# Altium PCB PCB1.pcbdoc
Units mil, origin at the board's own origin, x right, y up, seen from the top; angles counter-clockwise.
Board outline 4550 x 4400 mil, 2 copper layers (Top Layer, Bottom Layer); 39 components, 48 nets, 154 pads, 0 vias.
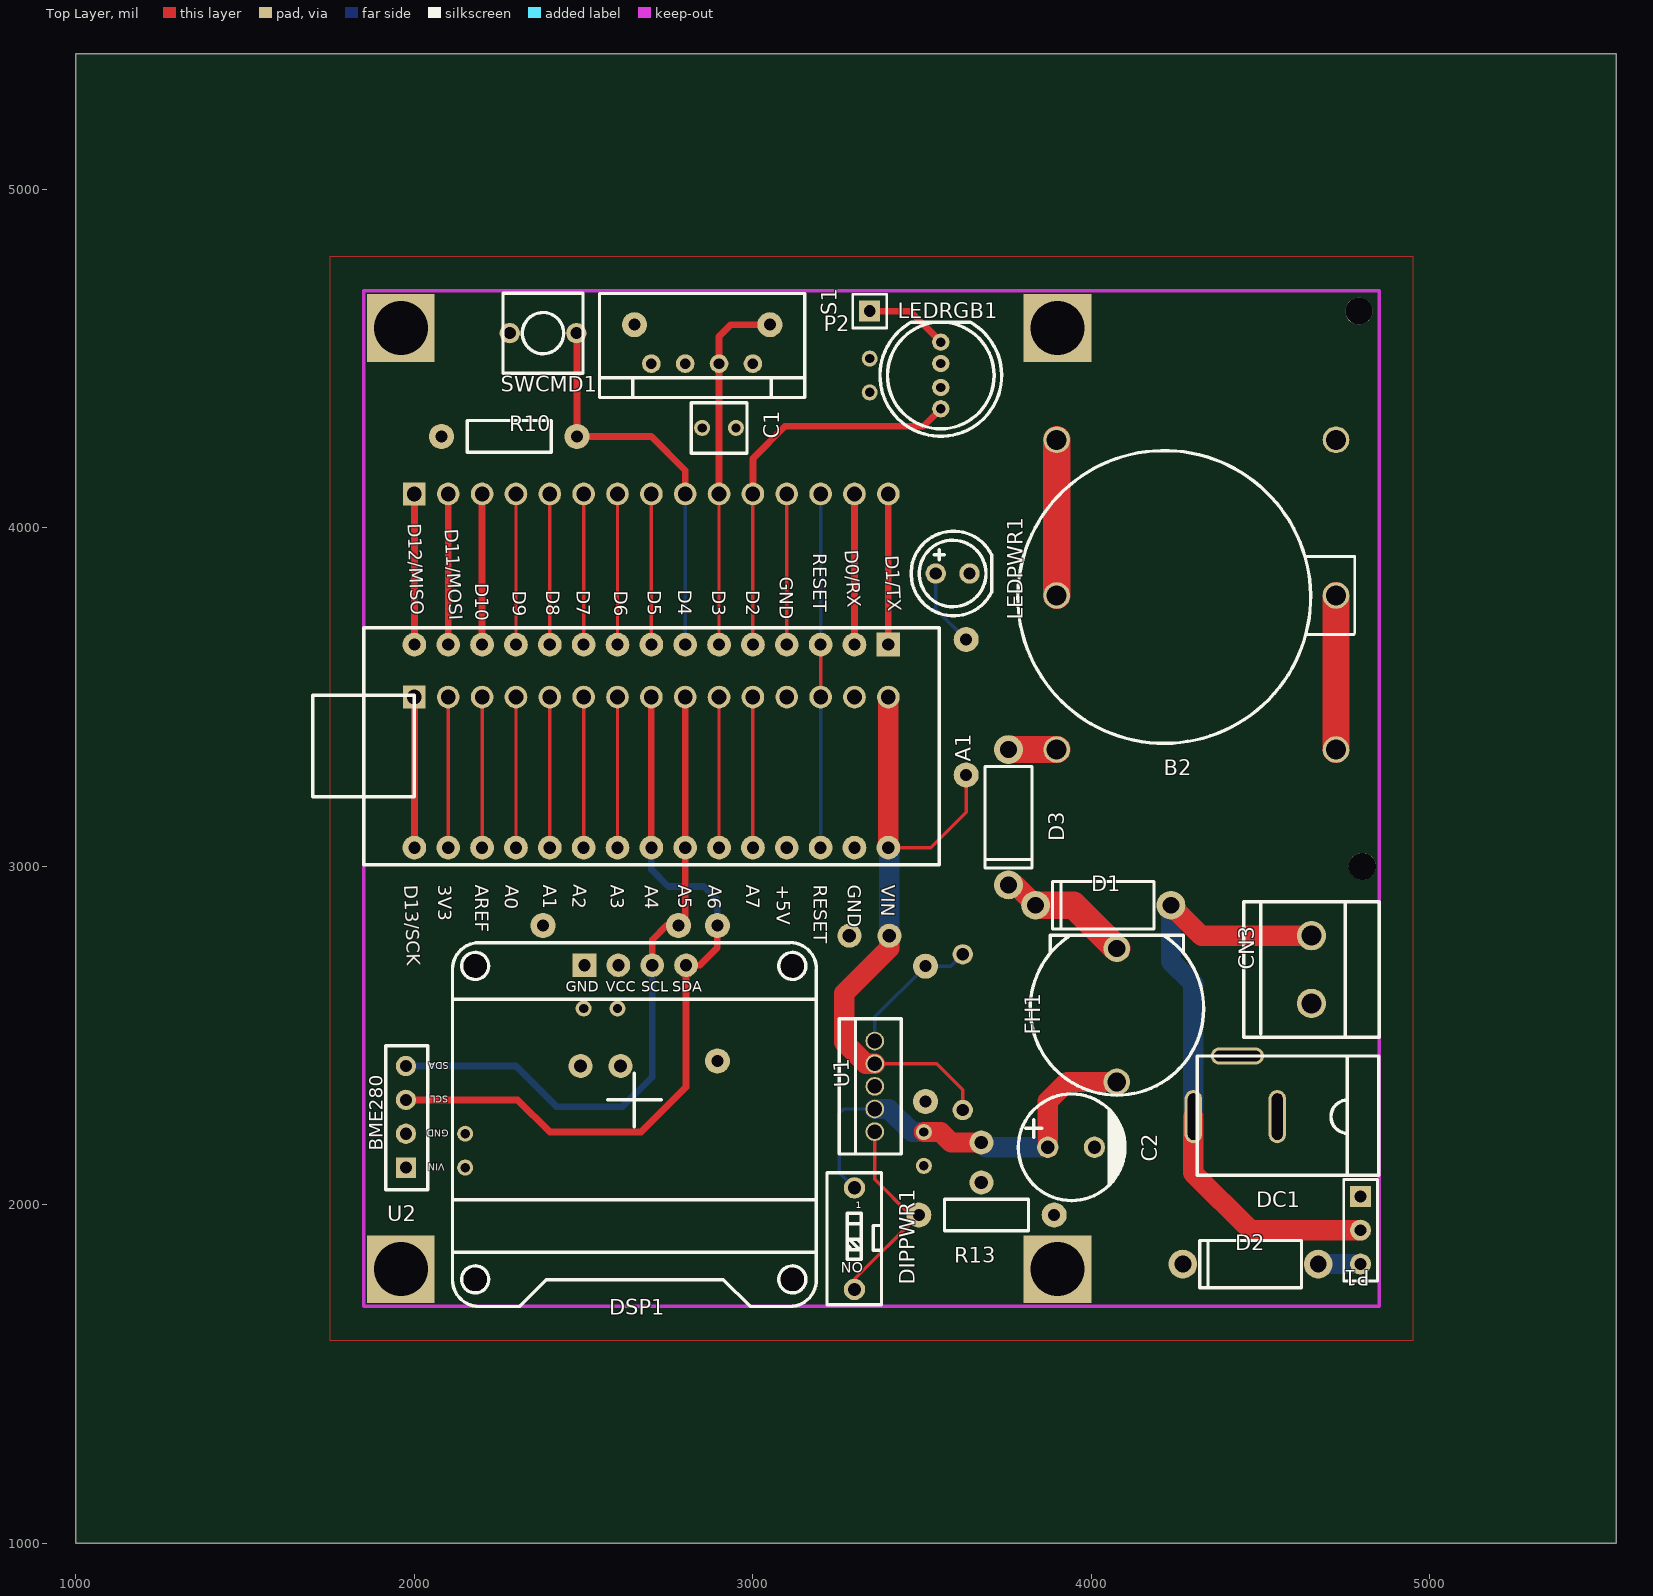
[diagram p0: Top Layer view]
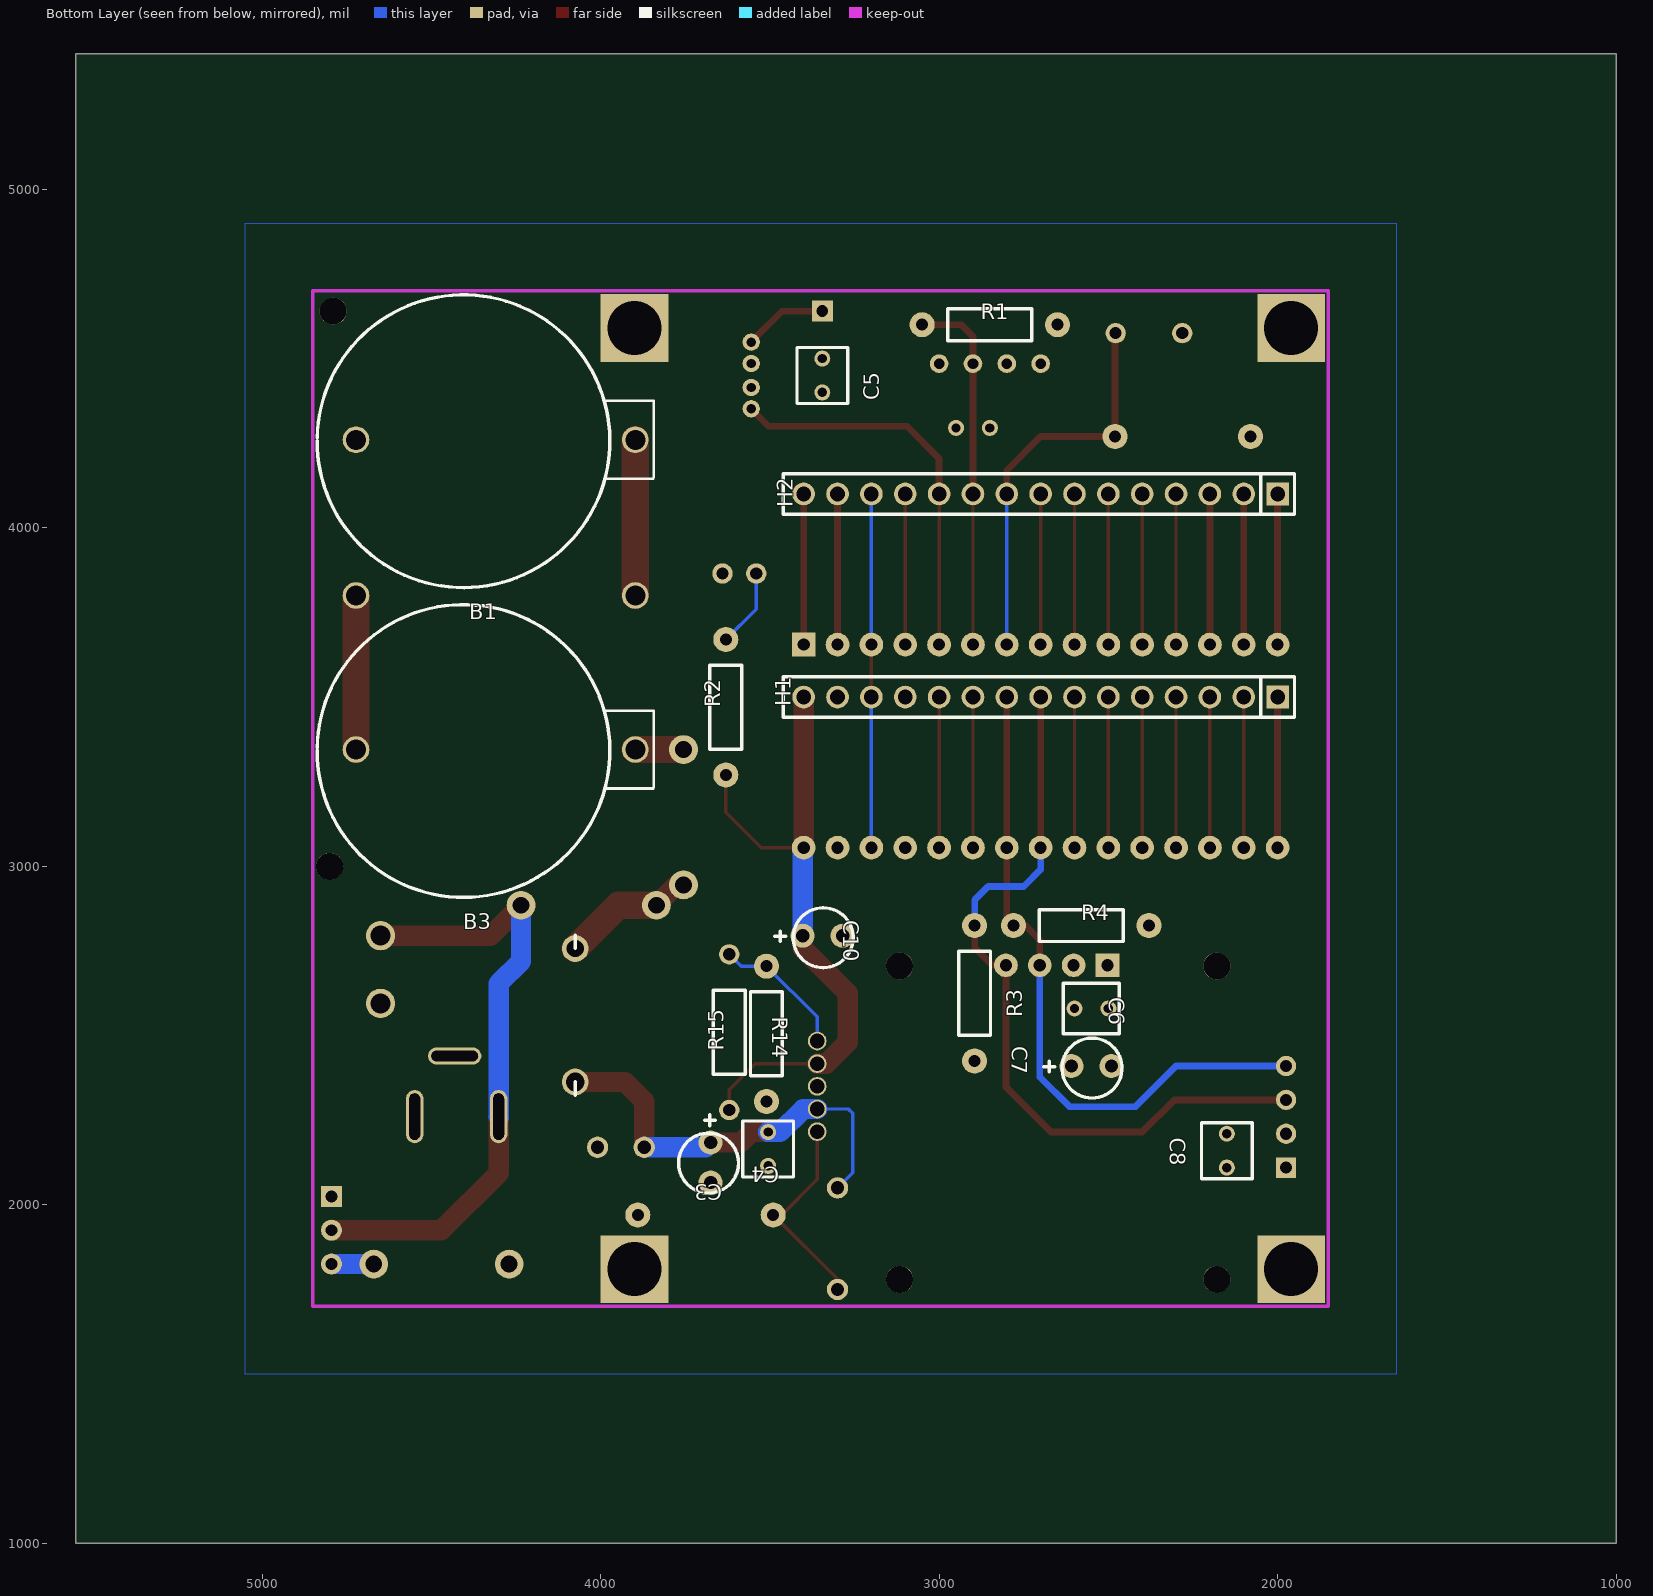
[diagram p1: Bottom Layer view, seen from below]

## Layer stack, top to bottom
Top Layer: signal copper (thickness not stored)
Dielectric: dielectric 12.6, FR-4, Dk 4.8
Bottom Layer: signal copper (thickness not stored)

## Board outline
5550,1000 1000,1000 1000,5400 5550,5400

## Components (designator, comment, footprint, x,y, rotation, side; value= is the part's Value field where it differs from the comment)
A1 "Arduino_Nano_V3" ARDUINO_NANO_V3 2700,3355 r270 top
B1 "BS-2-1" BATTERY-1#1 4310,4260 r180 bottom
B2 "BS-2-1" BATTERY-1#2 4310,3800 r180 top
B3 "BS-2-1" BATTERY-1#1 4310,3345 r180 bottom
C1 "100nF" CAP-CT4-0805-4.2X3.8#1 2900,4295 r180 top
C2 "100uF" CAP-D8.0XF3.5 3940,2170 r90 top
C3 "10uF" CAP-TAN-S2.5 3675,2125 r0 bottom
C4 "1uF" CAP-CT4-0805-4.2X3.8#2 3505,2165 r90 bottom
C5 "100nF" CAP-CT4-0805-4.2X3.8#2 3345,4450 r90 bottom
C6 "100nF" CAP-CT4-0805-4.2X3.8#2 2550,2580 r0 bottom
C7 "1uF" CAP-TAN-S2.5 2550,2410 r270 bottom
C8 "100nF" CAP-CT4-0805-4.2X3.8#2 2150,2160 r90 bottom
C10 "10uF" CAP-TAN-S2.5 3344.06,2795 r270 bottom
CN3 "MKDSN1.5/2-5.08" MKDSN1.5/2-5.08 4650,2695 r90 top
D1 "1N5817RLG" DO-15 4035,2885 r180 top
D2 "1N5817RLG" DO-15 4470,1825 r180 top
D3 "1N5817RLG" DO-15 3755,3145 r270 top
DC1 "DC005-2.0MM" DC-5020 4425,2350 r180 top
DIPPWR1 "VDG/S-01L blue" VDG/S-01L 3300,1900 r180 top
DSP1 "SSD1306 DSP ARDUINO" SSD1306_ARDUINO 2650,2310 r0 top
FH1 "Fuse-holder - C268208" "FUSE-HOLDER- C268208" 4075,2560 r270 top
H1 "Header-Female-2.54_1x15" DIP-1X15P2.54 2700,3500 r180 bottom
H2 "Header-Female-2.54_1x15" DIP-1X15P2.54 2700,4100 r180 bottom
LEDPWR1 "333-2SUGC/S400-A5-L" LED-TH_BD6.2-P2.54-FD 3590,3865 r0 top
LEDRGB1 "WS2812D-F8" LED-8.0-RGB4P 3555,4450 r270 top
P1 "PWR-VCD" HDR-3X1/2.54 4795,1925 r270 top
P2 "Header-Male-2.54_1x1" HDR-1X1/2.54 3345,4640 r0 top
R1 "1K" AXIAL-0.4#1 2850,4600 r0 bottom
R2 "330" AXIAL-0.4#1 3630,3470 r270 bottom
R3 "1K" AXIAL-0.4#1 2895,2625 r90 bottom
R4 "1K" AXIAL-0.4#1 2580,2825 r0 bottom
R10 "1K" AXIAL-0.4#2 2280,4270 r0 top
R13 "10K" AXIAL-0.4#2 3690,1970 r180 top
R14 "1.5K" AXIAL-0.4#1 3510,2505 r270 bottom
R15 "7.5K" AXIAL-6.3X2.4 3620,2510 r90 bottom
S1 "AM2302" AM2302 2850,4485 r180 top
SWCMD1 "KAN0654-0701A" KAN0654-0601B 2380,4575 r0 top
U1 "MIC29502WT-5.0" TO-220-5-(10.67X4.83) 3360,2350 r90 top
U2 "BME280 DOC" "BME280 DOC" 1975,2110 r180 top

## Footprints (in the part's own frame and the unit in brackets; to place one, negate y for a bottom-side part, rotate by r counter-clockwise, add the part's x,y. Pads: shape width x height; smd on the part's side, far side on the other; paste and mask are expansions set on the pad)
AM2302 [mm]
  round 1.4 hole 0.8: 1(-3.81,0) 2(-1.27,0) 3(1.27,0) 4(3.81,0)
  silkscreen extent -7.71,-5.26 7.7,2.54
ARDUINO_NANO_V3 [mil]
  rect 70x70 hole 36: 1(-300,700)
  round 70 hole 36: 2(-300,600) 3(-300,500) 4(-300,400) 5(-300,300) 6(-300,200) 7(-300,100) 8(-300,0) 9(-300,-100) 10(-300,-200) 11(-300,-300) 12(-300,-400) 13(-300,-500) 14(-300,-600) 15(-300,-700) 16(300,-700) 17(300,-600) 18(300,-500) 19(300,-400) 20(300,-300) 21(300,-200) 22(300,-100) 23(300,0) 24(300,100) 25(300,200) 26(300,300) 27(300,400) 28(300,500) 29(300,600) 30(300,700)
  silkscreen extent -350,-1000 350,850
AXIAL-0.4#1 [mil]
  round 74 hole 35.4: 1(200,0) 2(-200,0)
  silkscreen extent -124,-47 124,47
AXIAL-0.4#2 [mil]
  round 74 hole 35.4: 1(-200,0) 2(200,0)
  silkscreen extent -124,-47 124,47
AXIAL-6.3X2.4 [mil]
  round 60 hole 36: 1(230,0) 2(-230,0)
  silkscreen extent -124,-47 124,47
BATTERY-1#1 [mm]
  round 2 hole 1.5: 1(10.477,0) 2(-10.477,0)
  silkscreen extent -13.4,-11.09 11.87,10.87
BATTERY-1#2 [mm]
  round 2 hole 1.5: 1(-10.477,0) 2(10.477,0)
  silkscreen extent -11.87,-10.87 13.4,11.09
"BME280 DOC" [mil]
  rect 60x60 hole 36: 1(0,0)
  round 60 hole 36: 2(0,-100) 3(0,-200) 4(0,-300)
  silkscreen extent -65,-360 60,65
CAP-CT4-0805-4.2X3.8#1 [mm]
  round 1.2 hole 0.7: 1(-1.27,0) 2(1.27,0)
  silkscreen extent -2.1,-1.9 2.1,1.9
CAP-CT4-0805-4.2X3.8#2 [mm]
  round 1.2 hole 0.7: 1(1.27,0) 2(-1.27,0)
  silkscreen extent -2.1,-1.9 2.1,1.9
CAP-D8.0XF3.5 [mm]
  round 1.6 hole 1: 1(0,1.75) 2(0,-1.75)
  silkscreen extent -4,-4.04 4,3.96
CAP-TAN-S2.5 [mm]
  round 1.8 hole 1: 1(0,-1.5) 2(0,1.5)
  silkscreen extent -2.1,-3.6 2.4,2.29
DC-5020 [mm]
  oval 1.3x4 hole 0.8 slot 3.5 at 90 deg: 1(3.15,2.275) 2(-3.15,2.275)
  oval 4x1.3 hole 0.8 slot 3.5 at 0 deg: 3(-0.15,-2.275)
  silkscreen extent -10.75,-2.28 2.85,6.67
DIP-1X15P2.54 [mm]
  rect 1.7x1.7 hole 1.1: 1(17.78,0)
  round 1.7 hole 1.1: 2(15.24,0) 3(12.7,0) 4(10.16,0) 5(7.62,0) 6(5.08,0) 7(2.54,0) 8(0,0) 9(-2.54,0) 10(-5.08,0) 11(-7.62,0) 12(-10.16,0) 13(-12.7,0) 14(-15.24,0) 15(-17.78,0)
  silkscreen extent -19.3,-1.52 19.05,1.52
DO-15 [mil]
  round 85 hole 50: 1(-200,0) 2(200,0)
  silkscreen extent -150,-70 150,70
"FUSE-HOLDER- C268208" [mm]
  round 2 hole 1.3: 1(-5.005,0)
  round 2 hole 1.4: 2(5.005,0)
  silkscreen extent -6.01,-6.49 6,6.51
HDR-1X1/2.54 [mil]
  rect 62x62 hole 35: 1(0,0)
  silkscreen extent -50,-50 50,50
HDR-3X1/2.54 [mil]
  rect 62x62 hole 35: 1(-100,0)
  round 62 hole 35: 2(0,0) 3(100,0)
  silkscreen extent -150,-50 150,50
KAN0654-0601B [mil]
  round 60 hole 36: 1(-98.42,0) 2(98.43,0)
  silkscreen extent -118,-118 118,118
LED-8.0-RGB4P [mm]
  round 1.3 hole 0.7: 1(-2.499,0) 2(-0.899,0) 3(0.899,0) 4(2.499,0)
  silkscreen extent -4,-4.56 4.56,4.56
LED-TH_BD6.2-P2.54-FD [mil]
  round 60 hole 36: 1(-50,0) 2(50,0)
  silkscreen extent -122,-125 115,125
MKDSN1.5/2-5.08 [mm]
  round 2.2 hole 1.5: 1(-2.54,0) 2(2.54,0)
  silkscreen extent -5.08,-5.08 5.08,5.08
SSD1306_ARDUINO [mil]
  rect 70x70 hole 36: 1(-147.4,397.6)
  round 70 hole 36: 2(-47.4,397.63) 3(52.6,397.63) 4(152.6,397.63)
  round 80 hole 80 unplated: ""(-470.51,-530.27) ""(-470.51,395.63) ""(466.5,-530.27) ""(466.5,395.63)
  silkscreen extent -538,-610 538,465
TO-220-5-(10.67X4.83) [mm]
  round 1.4 hole 1.1: 1(-3.4,0) 2(-1.7,0) 3(0,0) 4(1.7,0) 5(3.4,0)
  silkscreen extent -5.08,-2 5.08,2.67
VDG/S-01L [mm]
  round 1.6 hole 1: 1(0,-3.81) 2(0,3.81)
  silkscreen extent -2.03,-4.95 2.06,4.95

## Free pads (board coordinates)
  rect 200x200 hole 160: 1(1960,1810) 1(1960,4590) 1(3900,1810) 1(3900,4590)
  round 80 hole 80 unplated: ""(4790,4640) ""(4800,3000)

## Nets (pads, with @x,y where several pads share a name; then routed paths per layer and width w, separated by ;. In a path a pad name is that pad's centre, name@x,y a point inside that pad or via, vN(x,y) a via of type N, cw(c..) or ccw(c..) an arc to the next point about the centre after c; other vN are vias at no path point)
+3V3: A1.17 H1.2 | length 445
  Top Layer w10: A1.17 H1.2
+5V: A1.27 C1.1 C5.1 C6.1 C7.1 C8.1 D2.2 DSP1.2 H1.12 LEDRGB1.2 R1.2 R3.2 R4.2 S1.1 SWCMD1.1 U2.1
+7V5: A1.30 C10.1 H1.15 R2.1 R15.2 U1.4 | length 1927.9
  Top Layer w10: U1.4 3543.1,2416.9 3620,2340 R15.2 ; A1.30 3525,3055 3630,3160 R2.1
  Top Layer w60: U1.4 3333.1,2416.9 3270,2480 3270,2625 3403.1,2758.1 C10.1 ; A1.30 H1.15
  Bottom Layer w60: A1.30 3403.12,3051.88 C10.1
A0: A1.19 H1.4 | length 445
  Top Layer w10: A1.19 H1.4
A1: A1.20 H1.5 | length 445
  Top Layer w10: A1.20 H1.5
A2: A1.21 H1.6 | length 445
  Top Layer w10: A1.21 H1.6
A3: A1.22 H1.7 | length 445
  Top Layer w10: A1.22 H1.7
A6: A1.25 H1.10 | length 445
  Top Layer w10: A1.25 H1.10
A7: A1.26 H1.11 | length 445
  Top Layer w10: A1.26 H1.11
B2_2: B1.1 B2.2 | length 460
  Top Layer w80: B2.2 B1.1
B3_2: B2.1 B3.2 | length 455
  Top Layer w80: B3.2 B2.1
D0/TX: A1.1 H2.15 | length 445
  Top Layer w20: A1.1 H2.15
D1/RX: A1.2 H2.14 | length 445
  Top Layer w20: A1.2 H2.14
D2: A1.5 H2.11 LEDRGB1.4 | length 1165.7
  Top Layer w10: A1.5 H2.11
  Top Layer w20: H2.11 3000,4205 3095,4300 3503.4,4300 LEDRGB1.4
D3/PWM: A1.6 H2.10 R1.1 S1.2 | length 1074.5
  Top Layer w10: A1.6 H2.10
  Top Layer w20: H2.10 S1.2 2900,4565 2935,4600 R1.1
D3_1: B3.1 D3.1 | length 142.5
  Top Layer w80: D3.1 B3.1
D4: A1.7 H2.9 R10.2 SWCMD1.2 | length 1182.1
  Top Layer w20: SWCMD1.2 2480,4573.43 R10.2 2700,4270 2800,4170 H2.9
  Bottom Layer w10: A1.7 H2.9
D5/PWM: A1.8 H2.8 | length 445
  Top Layer w10: A1.8 H2.8
D6/PWM: A1.9 H2.7 | length 445
  Top Layer w10: A1.9 H2.7
D7: A1.10 H2.6 | length 445
  Top Layer w10: A1.10 H2.6
D8: A1.11 H2.5 | length 445
  Top Layer w10: A1.11 H2.5
D9/PWM: A1.12 H2.4 | length 445
  Top Layer w10: A1.12 H2.4
D10/PWM/SS: A1.13 H2.3 | length 445
  Top Layer w20: A1.13 H2.3
D11/PWM/MOSI: A1.14 H2.2 | length 445
  Top Layer w20: A1.14 H2.2
D12/MISO: A1.15 H2.1 | length 445
  Top Layer w20: A1.15 H2.1
D13/SCK: A1.16 H1.1 | length 445
  Top Layer w20: A1.16 H1.1
DIPPWR1_2: DIPPWR1.2 R13.2 U1.1 | length 613.3
  Top Layer w10: DIPPWR1.2 3300,1780 R13.2 3465,1970 3360,2075 U1.1
FH1_1: D1.2 D3.2 FH1.1 | length 397.9
  Top Layer w60: D3.2 3775,2945 D1.2
  Top Layer w80: D1.2 3947.05,2885 FH1.1
GND: A1.4 A1.29 B1.2 C1.2 C2.2 C3.2 C4.2 C5.2 C6.2 C7.2 C8.2 C10.2 CN3.1 DC1.2 DC1.3 DSP1.1 H1.14 H2.12 LEDPWR1.2 LEDRGB1.3 P1.1 pad.1 R10.1 R13.1 R14.1 S1.3 S1.4 U1.3 U2.2 | length 445
  Top Layer w10: A1.4 H2.12
P1_3: D2.1 P1.3 | length 125
  Bottom Layer w60: D2.1 P1.3
P2_1: LEDRGB1.1 P2.1 | length 247.9
  Top Layer w20: P2.1 3463.4,4640 LEDRGB1.1
R2_2: LEDPWR1.1 R2.2 | length 232.3
  Bottom Layer w10: LEDPWR1.1 3540,3760 R2.2
R15_1: R14.2 R15.1 U1.5 | length 407.8
  Bottom Layer w10: U1.5 3360,2555 R14.2 3585,2705 R15.1
RST: A1.3 A1.28 H1.13 H2.13 | length 1045
  Top Layer w10: H1.13 A1.3
  Bottom Layer w10: A1.28 H1.13 ; A1.3 H2.13
S$6: 
S$8: 
S$12: 
S$14: 
S$15: 
S$27: 
S$39: 
S$46: 
S$54: 
SCL: A1.24 DSP1.3 H1.9 R4.1 U2.4 | length 1996.8
  Top Layer w20: DSP1.3 2702.6,2782.6 2745,2825 R4.1 2800,2845 A1.24 H1.9
  Bottom Layer w20: U2.4 2300,2410 2420,2290 2615,2290 2702.6,2377.6 DSP1.3
SDA: A1.23 DSP1.4 H1.8 R3.1 U2.3 | length 2278.2
  Top Layer w20: U2.3 2305,2310 2400,2215 2670,2215 2802.6,2347.6 DSP1.4 ; A1.23 H1.8 ; DSP1.4 2842.63,2707.63 2895,2760 R3.1
  Bottom Layer w20: A1.23 2700,2990 2750,2940 2855,2940 2895,2900 R3.1
VCC: C2.1 C3.1 C4.1 DIPPWR1.1 FH1.2 U1.2 | length 1270.5
  Top Layer w60: C4.1 3555,2215 3585.94,2184.06 C3.1 ; C2.1 3871.1,2306.1 3927.96,2362.96 FH1.2
  Bottom Layer w10: DIPPWR1.1 3255,2095 3255,2270 3268.07,2283.07 U1.2
  Bottom Layer w60: U1.2 3401.93,2283.07 3470,2215 C4.1 ; C3.1 3689.06,2170 C2.1
VIN: CN3.2 D1.1 DC1.1 P1.2 | length 1835.4
  Top Layer w60: D1.1 4325,2795 CN3.2 ; DC1.1 4300.99,2095.99 4300,2095 4470,1925 P1.2
  Bottom Layer w60: D1.1 4235,2720 4300.99,2654.01 DC1.1
VREF: A1.18 H1.3 | length 445
  Top Layer w10: A1.18 H1.3
pads on no net: DSP1.

## Polygon pours and split planes (outlines as drawn)
GND on Bottom Layer (solid): 1650,4900 1650,1500 5050,1500 5050,4900
+5V on Top Layer (solid): 1750,4800 1750,1600 4950,1600 4950,4800

## Text inside footprints (layer, text, board x,y; h text height)
A1: Top Overlay "D1/TX" at 3390.93,3917.65 h40 r273; Top Overlay "GND" at 3280,2945 h40 r270; Top Overlay "+5V" at 3070,2945 h40 r270; Top Overlay "D12/MISO" at 1980.01,4012.2 h40 r272; Top Overlay "VIN" at 3380,2945.35 h40 r269; Top Overlay "D13/SCK" at 1970.01,2944.3 h40 r272; Top Overlay "GND" at 3080,3854.7 h40 r270; Top Overlay "D0/RX" at 3270.93,3933.95 h40 r273; Top Overlay "RESET" at 3178.2,3924.1 h40 r270; Top Overlay "D2" at 2980,3815.4 h40 r270; Top Overlay "D3" at 2880,3815.4 h40 r270; Top Overlay "D4" at 2780,3817.2 h40 r270; Top Overlay "D5" at 2690,3815.4 h40 r270; Top Overlay "D6" at 2590,3813.6 h40 r270; Top Overlay "D7" at 2480,3815.4 h40 r270; Top Overlay "D8" at 2390,3815.4 h40 r270; Top Overlay "D9" at 2290,3813.6 h40 r270; Top Overlay "D10" at 2180,3836.5 h40 r270; Top Overlay "D11/MOSI" at 2090.03,3995.45 h40 r273; Top Overlay "3V3" at 2070,2945 h40 r270; Top Overlay "AREF" at 2180,2945 h40 r270; Top Overlay "A0" at 2270.03,2946.05 h40 r267; Top Overlay "A2" at 2470.05,2946.4 h40 r266; Top Overlay "A3" at 2580,2945 h40 r270; Top Overlay "A4" at 2680,2944.65 h40 r271; Top Overlay "A5" at 2780,2945 h40 r270; Top Overlay "A6" at 2870.03,2946.05 h40 r267; Top Overlay "A7" at 2980,2945 h40 r270; Top Overlay "RESET" at 3180,2945 h40 r270
DIPPWR1: Top Overlay "ON" at 3326,1829.75 h31.5 r180; Top Overlay "1" at 3303.8,1989.36 h19.68
DSP1: Top Overlay "VCC" at 2565.4,2628.98 h31.5; Top Overlay "GND" at 2447.2,2628.88 h31.5; Top Overlay "SCL" at 2669.7,2629.78 h31.5; Top Overlay "SDA" at 2762.2,2629.38 h31.5
U2: Top Overlay "VIN" at 2089.47,2121.8 h20 r179; Top Overlay "GND" at 2101.1,2221.8 h20 r180; Top Overlay "SCL" at 2099.3,2321.8 h20 r180; Top Overlay "SDA" at 2102,2421.8 h20 r180; Top Overlay "BME280" at 1906.8,2160 h40 r90